# Altium PCB PCB_layout.PcbDoc
Units mil, origin at the board's own origin, x right, y up, seen from the top; angles counter-clockwise.
Board outline 2365 x 2720 mil, 2 copper layers (Top Layer, Bottom Layer); 30 components, 34 nets, 115 pads, 12 vias.
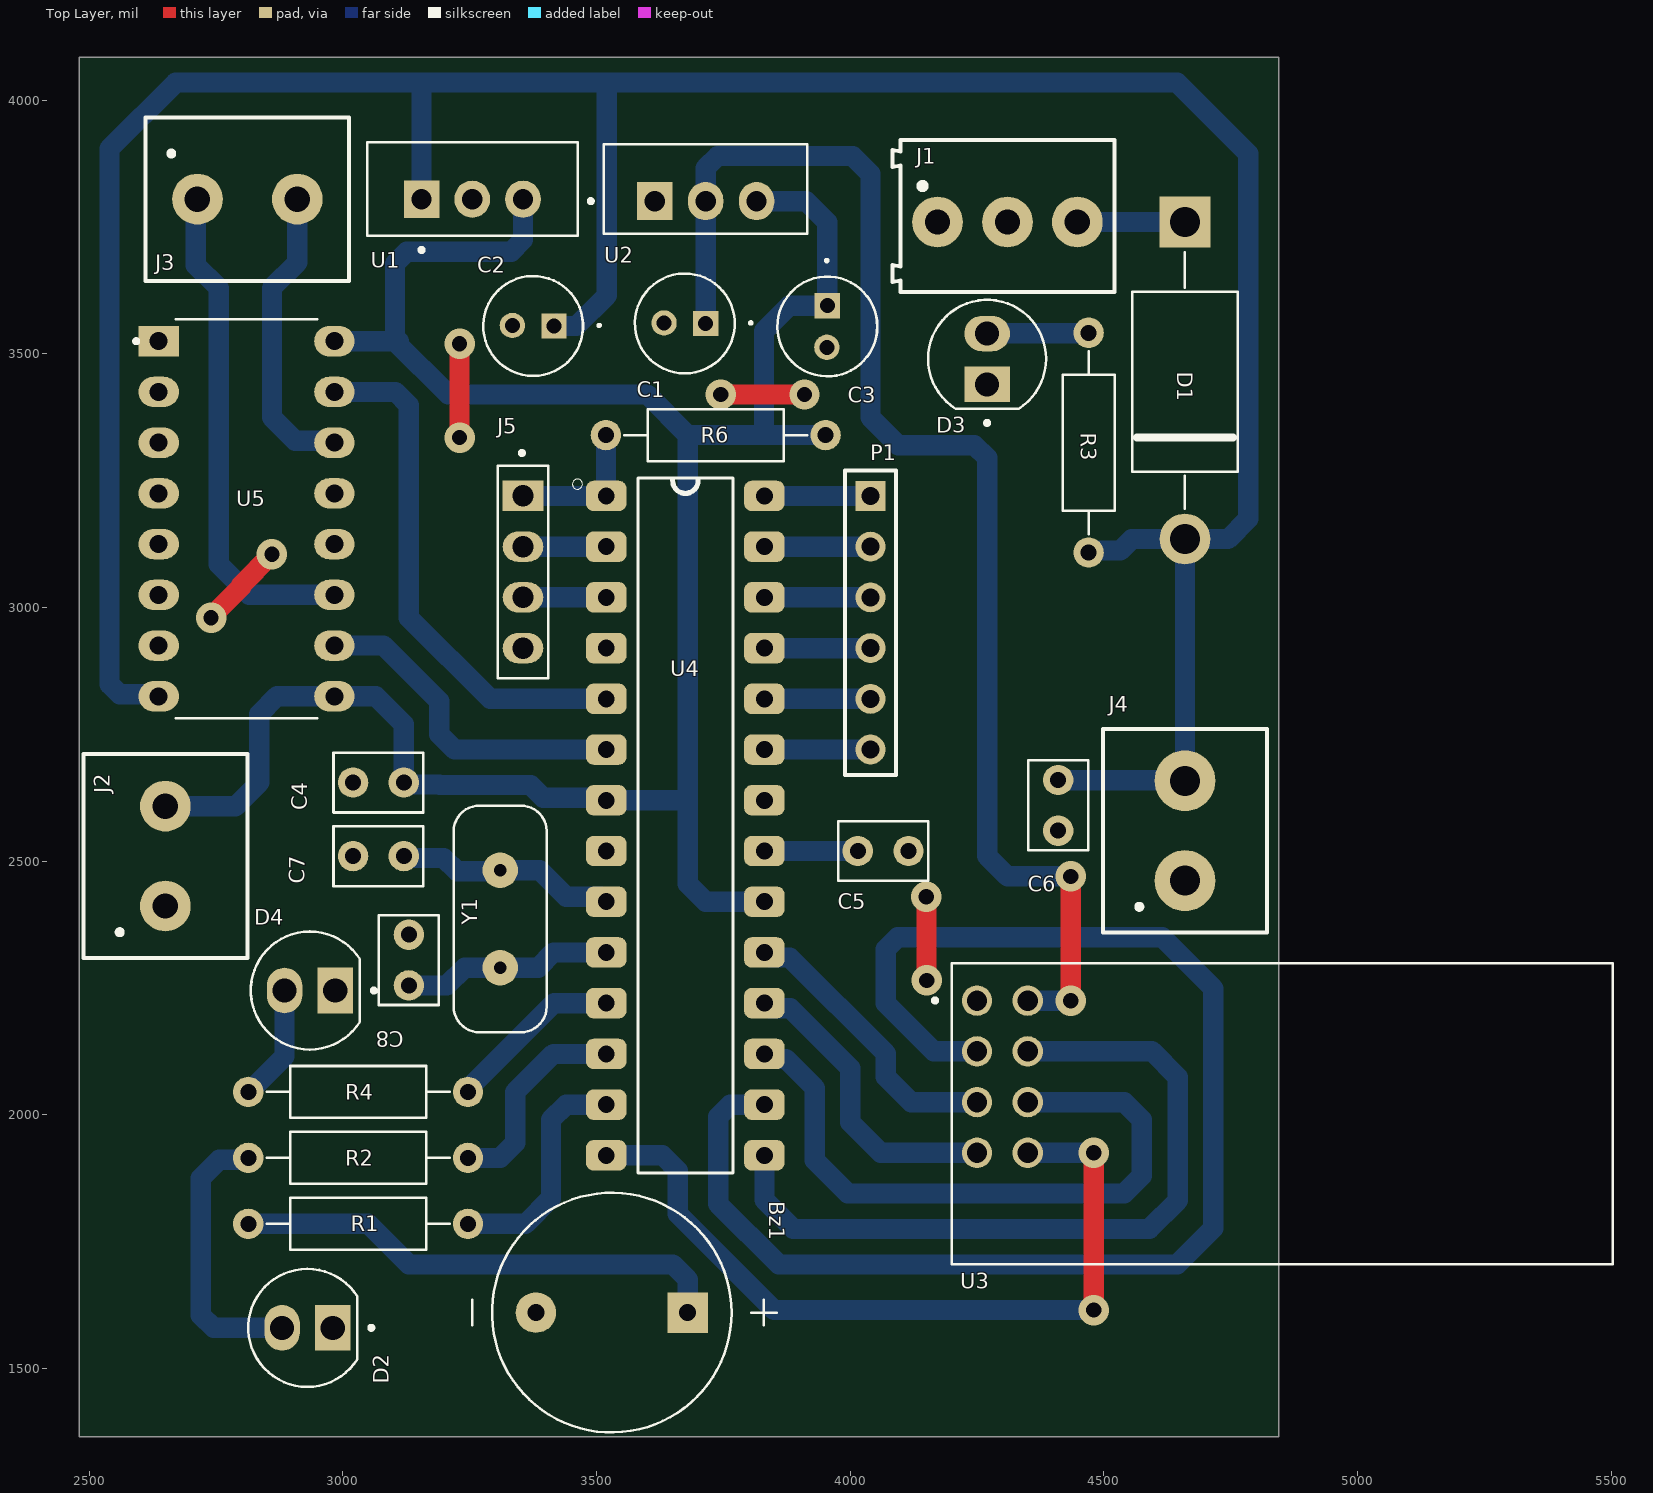
[diagram p0: Top Layer view]
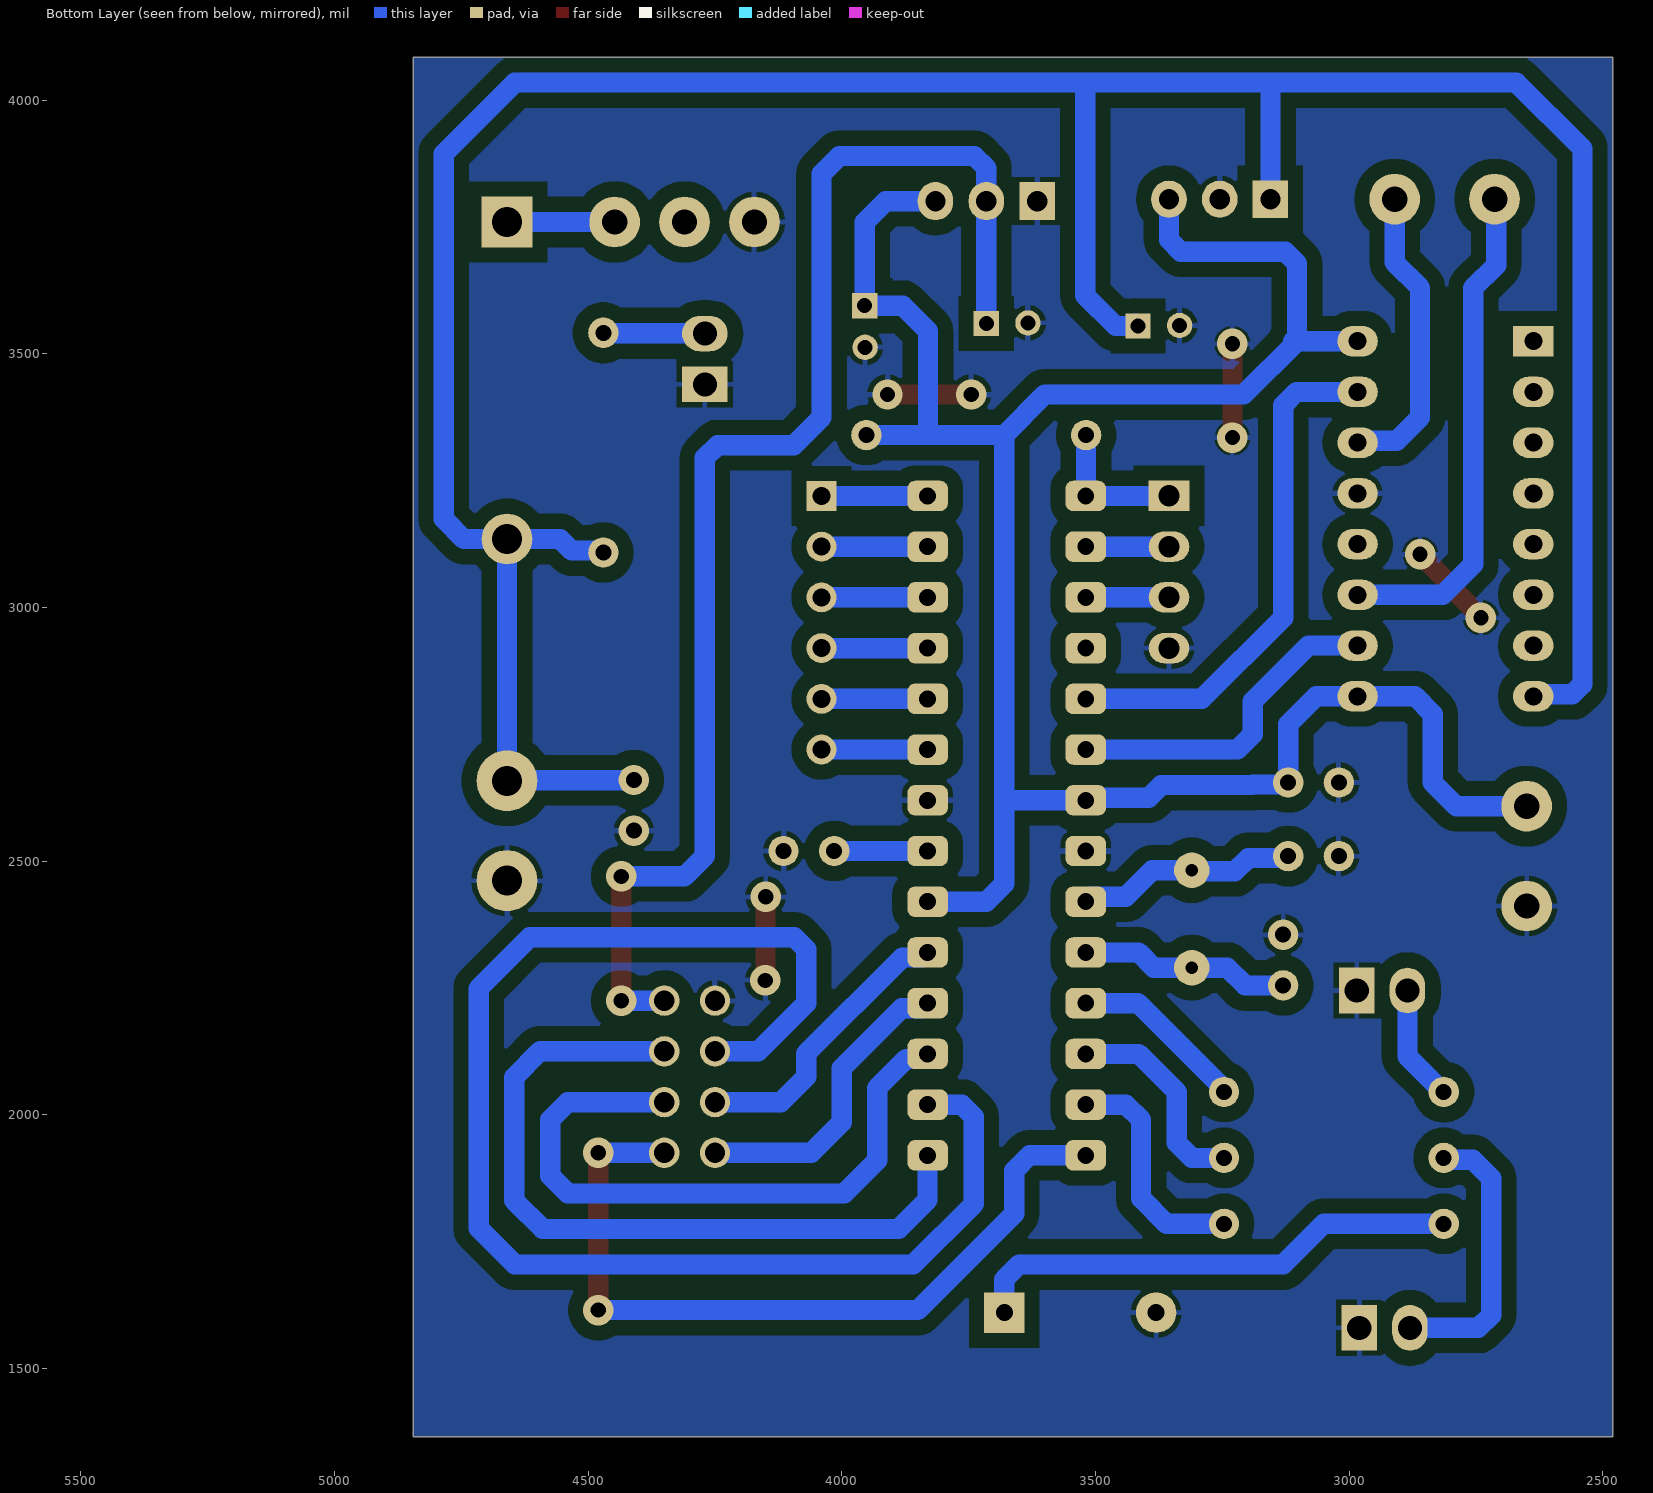
[diagram p1: Bottom Layer view, seen from below]
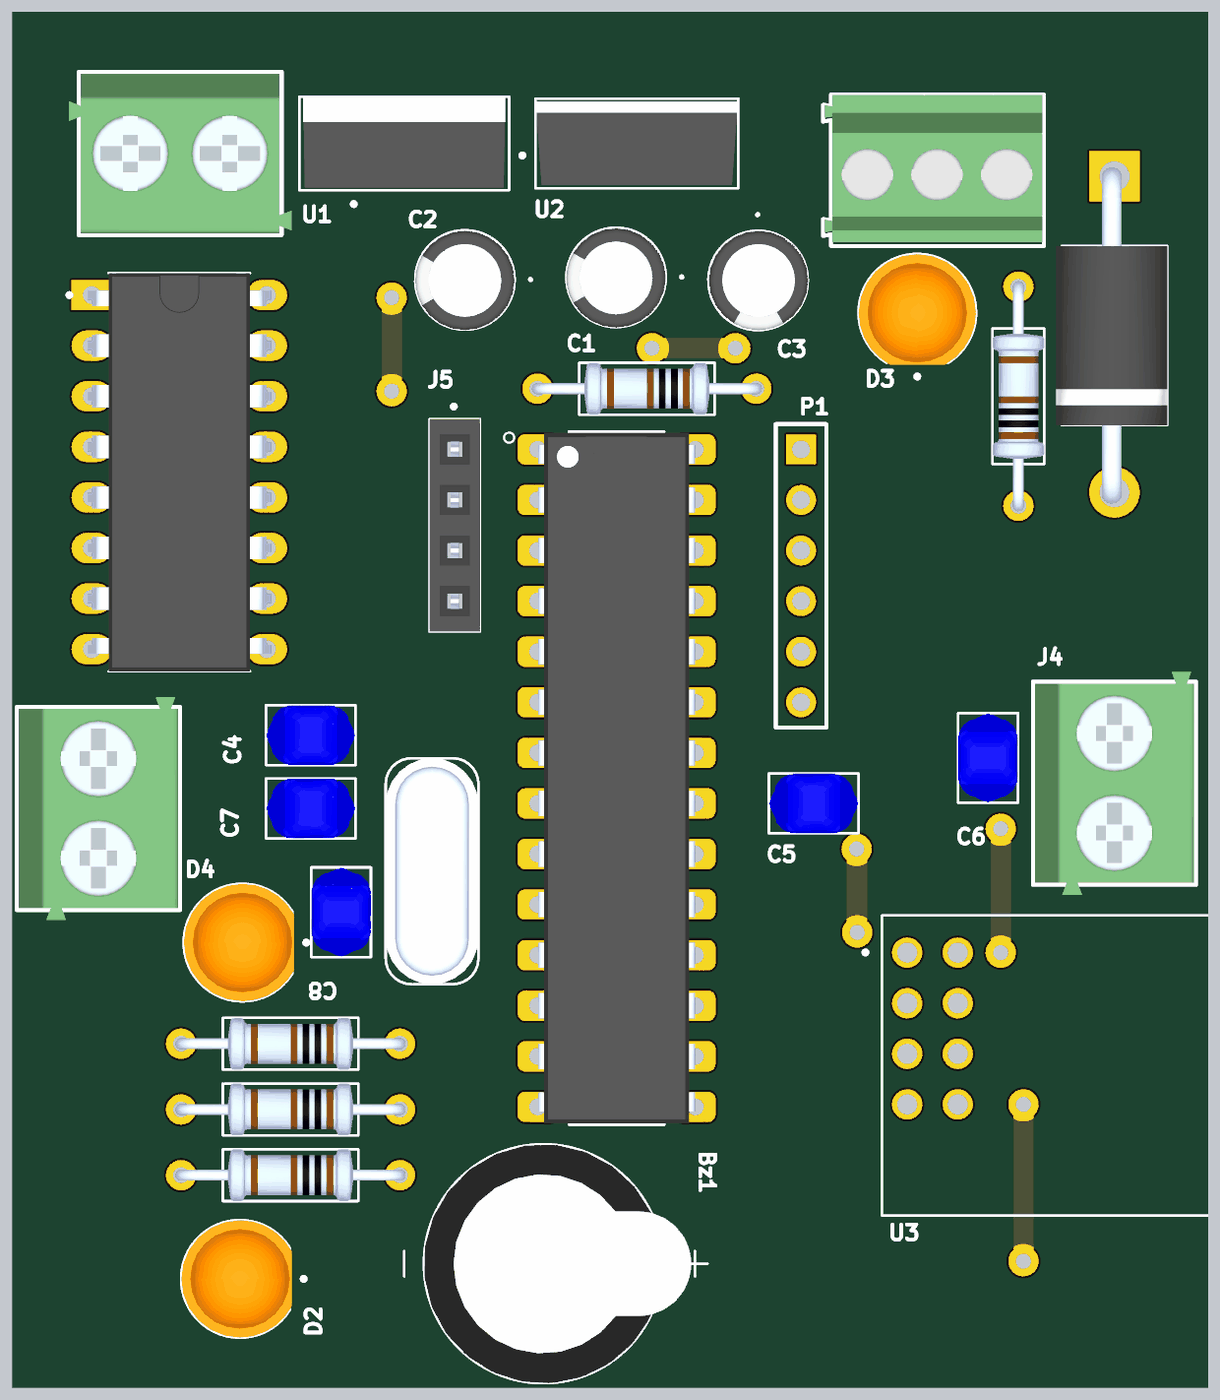
[diagram p2: 3D render of the assembled board from above, using the file's embedded part models]

## Layer stack, top to bottom
Top Solder: solder mask 0.4, Solder Resist, Dk 3.5
Top Layer: signal copper 1.4
Dielectric 1: dielectric 12.6, FR-4, Dk 4.8
Bottom Layer: signal copper 1.4
Bottom Solder: solder mask 0.4, Solder Resist, Dk 3.5

## Board outline
2480,1365 4845,1365 4845,4085 2480,4085

## Design rules (kind name [scope] priority, off if disabled: settings)
Clearance [All] p1: gap=30 ignorepadtopadclearanceinfootprint=FALSE
PolygonConnect [All] p1: connectstyle=Relief reliefconductorwidth=10 reliefentries=4 polygonreliefangle="90 Angle" airgapwidth=10
RoutingVias [All] p1: holewidth=30 width=60 viastyle="Through Hole" minholewidth=30 minwidth=60 maxholewidth=30 maxwidth=60
SolderMaskExpansion [All] p1: expansion=4 istentingtop=FALSE
Width [All] p1: maxlimit=50 minlimit=30 preferedwidth=40
30 further rules are at their usual default settings.

## Components (designator, comment, footprint, x,y, rotation, side; value= is the part's Value field where it differs from the comment)
Bz1 "AI-1223-TWT-12V-R" XDCR_AI-1223-TWT-12V-R 3530,1610 r270 top
C1 "10uF" CAPPRD500W50D500H1100 3674,3560 r180 top
C2 "100uF" CAPPRD500W50D500H1100 3375,3555 r180 top
C3 "10uF" CAPPRD500W50D500H1100 3955,3554 r270 top
C4 "100nF" CAPRB500W50L450T300H550 3020,2655 r0 top
C5 "100nF" CAPRB500W50L450T300H550 4115,2520 r180 top
C6 "100nF" CAPRB500W50L450T300H550 4410,2560 r90 top
C7 "22pF" CAPRB500W50L450T300H550 3020,2510 r0 top
C8 "22pF" CAPRB500W50L450T300H550 3130,2355 r270 top
D1 "1N5404" DIOAD1990W125L900D530 4660,3445 r270 top
D2 "L08R5000Q1" LEDRD254W57D500H1070 2930,1580 r180 top
D3 "L08R5000Q1" LEDRD254W57D500H1070 4270,3490 r90 top
D4 "L08R5000Q1" LEDRD254W57D500H1070 2935,2245 r180 top
J1 "691214110003" 691214110003 4310,3760 r0 top
J2 "TBlock 2" 691111710002#1 2650,2510 r90 top
J3 "TBlock 2" 691111710002#1 2811.57,3805 r0 top
J4 "TBlock 2" 691111710002#2 4660,2560 r90 top
J5 "Header 4" SULLINS_PPTC041LFBN-RC 3355,3070 r270 top
P1 "Header 6" HDR1X6 4040,3220 r270 top
R1 "100" RESAD1100W55L680D260 3030,1785 r0 top
R2 "220" RESAD1100W55L680D260 3030,1915 r0 top
R3 "1k" RESAD1100W55L680D260 4470,3325 r270 top
R4 "220" RESAD1100W55L680D260 3030,2045 r0 top
R6 "1k" RESAD1100W55L680D260 3735,3340 r0 top
U1 "LM7805" TO254P1054X470X1955-3 3255,3805 r0 top
U2 "LD1117V33" TO255P1020X450X1968-3 3715,3825 r0 top
U3 "NRF24L01P-MODULE-PCB" XCVR_NRF24L01P-MODULE-PCB 4851.75,2001.82 r0 top
U4 "ATMEGA328" DIP794W46P254L2967H457Q28B 3675,2570 r0 top
U5 "LD293" DIP880W50P254L2000H510Q16 2810,3175 r0 top
Y1 "16MHz" XTAL_ECS-160-20-4X 3310,2386.06 r270 top

## Footprints (in the part's own frame and the unit in brackets; to place one, negate y for a bottom-side part, rotate by r counter-clockwise, add the part's x,y. Pads: shape width x height; smd on the part's side, far side on the other; paste and mask are expansions set on the pad)
691111710002#1 [mm]
  round 2.54 hole 1.27: 1(-2.5,0) 2(2.5,0)
  silkscreen extent -5.1,-4.1 5.1,4.1, body extent -5.6,-4 5.6,4, height 11.01
691111710002#2 [mm]
  round 3.048 hole 1.5: 1(-2.5,0) 2(2.5,0)
  silkscreen extent -5.1,-4.1 5.1,4.1, body extent -5.6,-4 5.6,4, height 11.01
691214110003 [mm]
  round 2.54 hole 1.27: 1(-3.5,0) 2(0,0) 3(3.5,0)
  silkscreen extent -5.75,-3.5 5.35,4.1, body extent -5.68,-3.32 5.28,4.08, height 8.51
CAPPRD500W50D500H1100 [mil]
  round 50 hole 29.53: N(41,-1)
  rect 50x50 hole 29.53: P(-41,0)
  silkscreen extent -131,-98 98,98, body extent -108,-97 108,99, height 434
CAPRB500W50L450T300H550 [mil]
  round 60 hole 31.5: 1(0,0) 2(100,0)
  silkscreen extent -39,-59 139,59, body extent -38,-59 138,59, height 210
DIOAD1990W125L900D530 [mil]
  rect 100x100 hole 59.06: A(-315,0)
  round 100 hole 59.06: C(310,0)
  silkscreen extent -255,-104 250,104, body extent -332,-115 332,105, height 220
DIP794W46P254L2967H457Q28B [mil]
  rrect50% 80x60 hole 33.46: 1(-155.91,650) 2(-155.91,550) 3(-155.91,450) 4(-155.91,350) 5(-155.91,250) 6(-155.91,150) 7(-155.91,50) 8(-155.91,-50) 9(-155.91,-150) 10(-155.91,-250) 11(-155.91,-350) 12(-155.91,-450) 13(-155.91,-550) 14(-155.91,-650) 15(155.91,-650) 16(155.91,-550) 17(155.91,-450) 18(155.91,-350) 19(155.91,-250) 20(155.91,-150) 21(155.91,-50) 22(155.91,50) 23(155.91,150) 24(155.91,250) 25(155.91,350) 26(155.91,450) 27(155.91,550) 28(155.91,650)
  silkscreen extent -223,-685 94,685, body extent -156,-682 156,683, height 180
DIP880W50P254L2000H510Q16 [mil]
  rect 80x60 hole 35.43: 1(-173.23,350)
  oval 80x60 hole 35.43: 2(-173.23,250) 3(-173.23,150) 4(-173.23,50) 5(-173.23,-50) 6(-173.23,-150) 7(-173.23,-250) 8(-173.23,-350) 9(173.23,-350) 10(173.23,-250) 11(173.23,-150) 12(173.23,-50) 13(173.23,50) 14(173.23,150) 15(173.23,250) 16(173.23,350)
  silkscreen extent -221,-394 140,394, body extent -182,-394 182,394, height 201
HDR1X6 [mm] "Connector; Header; 6 Position"
  rect 1.5x1.5 hole 0.9: 1(0,0)
  round 1.5 hole 0.9: 2(2.54,0) 3(5.08,0) 4(7.62,0) 5(10.16,0) 6(12.7,0)
  silkscreen extent -1.27,-1.27 13.97,1.27
LEDRD254W57D500H1070 [mil]
  oval 70x90 hole 47.64: A(50,0)
  rect 70x90 hole 47.64: C(-50,0)
  silkscreen extent -130,-116 116,116, body extent -102,-116 116,116, height 358
RESAD1100W55L680D260 [mil]
  round 60 hole 31.5: 1(-216.54,0) 2(216.54,0)
  silkscreen extent -180,-51 180,51, body extent -227,-51 227,51, height 101
SULLINS_PPTC041LFBN-RC [mil]
  rect 60x80 hole 42.13: 1(-150,0)
  oval 60x80 hole 42.13: 2(-50,0) 3(50,0) 4(150,0)
  silkscreen extent -239,-50 210,50, body extent -210,-50 210,50, height 335
TO254P1054X470X1955-3 [mil]
  rect 70x73.23 hole 40: 1(-100,0)
  oval 70x73.23 hole 40: 2(0,0) 3(100,0)
  silkscreen extent -207,-104 207,113, body extent -200,-68 200,112, height 771
TO255P1020X450X1968-3 [mm]
  rect 1.778x1.91 hole 1.016: 1(-2.55,-0.605)
  oval 1.778x1.91 hole 1.016: 2(0,-0.605) 3(2.55,-0.605)
  silkscreen extent -5.85,-2.25 5.1,2.25, body extent -5.08,-2.09 5.08,2.11, height 22.87
XCVR_NRF24L01P-MODULE-PCB [mil]
  round 60 hole 40: 1(-601.75,223.18) 2(-501.75,223.18) 3(-601.75,123.18) 4(-501.75,123.18) 5(-601.75,23.18) 6(-501.75,23.18) 7(-601.75,-76.82) 8(-501.75,-76.82)
  silkscreen extent -688,-296 652,296
XDCR_AI-1223-TWT-12V-R [mil]
  round 80 hole 33.46: N(0,-149.61)
  rect 80x80 hole 33.46: P(0,149.61)
  silkscreen extent -236,-275 236,325, body extent -236,-236 236,293, height 376
XTAL_ECS-160-20-4X [mil]
  round 70 hole 24.8: 1(-96.06,0) 2(96.06,0)
  silkscreen extent -223,-92 223,92, body extent -223,-92 223,92, height 138

## Part data
Bz1: library part Buzzer, "ELECTRO-MECHANICAL AUDIO INDICATOR", Package="2225 PUI Audio", Availability="In Stock", MF="PUI Audio,", MP=AI-1223-TWT-12V-R, Price=None, Purchase-URL=https://pricing.snapeda.com/search/part/AI-1223-TWT-12V-R/?ref=eda
C1 C2 C3: library part "Electrolytic capacitor", "FS-A", Package=None, Availability=Unavailable, MF="{'manufacturer': u'Panasonic'}", MP=EEUFS0J221B, Price=None
C4 C5 C6 C7 C8: library part "Ceramic capacitor", "2200 pF Â±10% 250V Ceramic Capacitor X7R Radial", Package="Radial TDK", Check_prices=https://www.snapeda.com/parts/FG24X7R2E222KNT06/TDK/view-part/?ref=eda, Digi-Key_Part_Number=445-173386-1-ND, MF=TDK, MP=FG24X7R2E222KNT06, Purchase-URL=https://pricing.snapeda.com/search/part/FG24X7R2E222KNT06/?ref=eda, SnapEDA_Link=https://www.snapeda.com/parts/FG24X7R2E222KNT06/TDK/view-part/?ref=snap
D1: library part "Schrotic diode", "Diode Standard 400 V 3A Through Hole DO-201AD", Package="AXIAL LEAD-2 ON Semiconductor", Availability="In Stock", Check_prices=https://www.snapeda.com/parts/1N5404/Onsemi/view-part/?ref=eda, MF="ON Semiconductor", MP=1N5404, Price=None, Purchase-URL=https://pricing.snapeda.com/search/part/1N5404/?ref=eda, SnapEDA_Link=https://www.snapeda.com/parts/1N5404/Onsemi/view-part/?ref=snap
D2 D3 D4: library part LED, "LED, Orange, Through Hole, T-1 3/4 (5mm), 30 mA, 2.1 V, 635 nm", Package=None, Availability=Unavailable, MF="{'manufacturer': u'LED Technology'}", MP=L08R5000Q1, Price=None
J1: library part "Terminal blocks - 3Pins (Small)", "3 Position Wire to Board Terminal Block Horizontal with Board 0.138 (3.50mm) Through Hole", Package=None, Availability="In Stock", Check_prices=https://www.snapeda.com/parts/691214110003/Wurth+Elektronik/view-part/?ref=eda, MF="Wurth Elektronik", MP=691214110003, Price=None, Purchase-URL=https://pricing.snapeda.com/search/part/691214110003/?ref=eda, SnapEDA_Link=https://www.snapeda.com/parts/691214110003/Wurth+Elektronik/view-part/?ref=snap
J2 J3 J4: library part "Terminal Block - 2Pins", "2 Position Wire to Board Terminal Block Horizontal with Board 0.197 _5.00mm_ Through Hole", Package=None, Availability=Unavailable, MF="Wurth Electronics", MP=691111710002, Price=None, SnapEDA_Link=https://www.snapeda.com/parts/691111710002/Wurth%20Electronics%20Inc./view-part/1195092/?ref=snap
J5: library part "Female header - 4Pins", "4 Position Header Connector Through Hole", Package=None, Availability=Warning, Check_prices=https://www.snapeda.com/parts/PPTC041LFBN-RC/Sullins%20Connector%20Solutions/view-part/285917/?ref=eda, MF="Sullins Connector", MP=PPTC041LFBN-RC, Price=None, Purchase-URL=https://pricing.snapeda.com/search/part/PPTC041LFBN-RC/?ref=eda, SnapEDA_Link=https://www.snapeda.com/parts/PPTC041LFBN-RC/Sullins%20Connector%20Solutions/view-part/285917/?ref=snap
P1: "Header, 6-Pin", LatestRevisionDate=17-Jul-2002, LatestRevisionNote="Re-released for DXP Platform.", Publisher="Altium Limited"
R1 R2 R3 R4 R6: library part "Resistor (0.25W)", "(MFR-25FBF52-10K) 10,2 kOhm bei 1% 0,25W, 1/4W Durchbohrlochwiderstand Axial Metal Film", Package="Axial Yageo", Digi-Key_Part_Number=10.2KXBK-ND, MF=Yageo, MP=MFR-25FBF52-10K, Purchase-URL=https://pricing.snapeda.com/search/part/MFR-25FBF52-10K/?ref=eda, SnapEDA_Link=https://www.snapeda.com/parts/MFR-25FBF52-10K/Yageo/view-part/424333/?ref=snap
U1: library part LM7805CT/NOPB, Package=None, Availability=Unavailable, MP=LM7805CT/NOPB, Price=None
U2: Package=None, Availability=Unavailable, MP=LD1117V33, Price=None
U3: "- Transceiver For Use With nRF24L01+", Package=None, Availability=Bad, MF="Nordic Semiconductor", Mouser-Purchase-URL=https://snapeda.com/shop?store=Mouser&id=230534, MP=NRF24L01P-MODULE-PCB, Price=None, SnapEDA_Link=https://www.snapeda.com/parts/NRF24L01P-MODULE-PCB/Nordic%20Semiconductor%20ASA/view-part/230534/?ref=snap
U4: library part ATMEGA328P-PU, "ATmega Series 20 MHz 32 KB Flash 2 KB SRAM 8-Bit Microcontroller - DIP-28", Package=None, Availability=Unavailable, MP=ATMEGA328P-PU, Price=None
U5: library part L293D, "4-Channel Motor Driver 24V 16-Pin Power PDIP Tube", Package=None, Availability=Unavailable, MP=L293D, Price=None
Y1: library part "Crystal oscilator", "CRYSTAL T/H", Package=None, Availability=Unavailable, MF="{'manufacturer': u'ECS Inc.'}", MP=ECS-160-S-4, Price=None

## Via types
v1: diameter 60, hole 30, Top Layer to Bottom Layer, 12 vias

## Nets (pads, with @x,y where several pads share a name; then routed paths per layer and width w, separated by ;. In a path a pad name is that pad's centre, name@x,y a point inside that pad or via, vN(x,y) a via of type N, cw(c..) or ccw(c..) an arc to the next point about the centre after c; other vN are vias at no path point)
+3V3: C1.P U2.2 U3.2 | length 2695.5
  Top Layer w40: v1(4435,2225) v1(4435,2470)
  Bottom Layer w40: C1.P 3715,3866.57 3738.43,3890 4005,3890 4040,3855 4040,3375 4095,3320 4245,3320 4270,3295 4270,2510 4310,2470 v1(4435,2470) ; U3.2 v1(4435,2225)
+12: C2.P C6.2 D1.C J4.2 R3.2 U1.1 U5.8 | length 6095.6
  Bottom Layer w40: U5.8 2632.95,2828.83 2559.6,2828.83 2540,2848.43 2540,3905 2670,4035 3155,4035 ; U1.1 3155,4035 ; C2.P@3421,3560 C2.P 3460,3555 3520,3615 3520,4035 ; C6.2 4410.79,2659.21 4659.21,2659.21 J4.2 D1.C ; R3.2 4473.83,3112.29 4532.29,3112.29 4555,3135 D1.C ; 3155,4035 3520,4035 ; 3520,4035 4645,4035 4785,3895 4785,3175 4745,3135 D1.C
buzzer: R1.2 U4.13 | length 460.7
  Bottom Layer w40: R1.2 3360,1785 3410,1835 3410,1990 3440,2020 U4.13
CE: U3.3 U4.16 | length 2824.3
  Bottom Layer w40: U4.16 3763.43,2020 3740,1996.57 3740,1823.99 3858.99,1705 4645,1705 4715.93,1775.93 4715.93,2249.07 4615,2350 4093.43,2350 4070,2326.57 4070,2220 4165,2125 U3.3
CSN: U3.4 U4.15 | length 1509.9
  Bottom Layer w40: U4.15 3830.91,1832.08 3887.99,1775 4590,1775 4645.93,1830.93 4645.93,2074.07 4595,2125 U3.4
echo: P1.6 U4.23 | length 209.1
  Bottom Layer w40: U4.23 P1.6
GND: Bz1.N C1.N C2.N C3.N C4.1 C5.1 C6.1 C7.1 C8.1 D2.C D3.C D4.C J1.1 J2.1 J4.1 J5.4 U1.2 U2.1 U3.1 U4.8 U4.22 U5.13 | length 690.1
  Top Layer w40: v1(2740,2980) 2740,2981.56 2799.32,3040.88 2799.32,3044.32 v1(2860,3105) ; v1(3230,3335) v1(3230,3520) ; v1(3745,3420) v1(3910,3420) ; v1(4150,2430) 4150.53,2429.47 4150.53,2274.24 4151.07,2273.71 v1(4151.07,2265)
green_led: R4.2 U4.11 | length 346.8
  Bottom Layer w40: R4.2@3246.54,2046.54 3246.54,2050.41 3280,2083.88 3280,2083.99 3416.01,2220 U4.11
GSM_rx: P1.4 U4.25 | length 209.1
  Bottom Layer w40: U4.25 P1.4
GSM_tx: P1.3 U4.26 | length 209.1
  Bottom Layer w40: U4.26 P1.3
IRQ: U3.8 U4.14 | length 1577
  Top Layer w40: v1(4480,1615) v1(4480,1925)
  Bottom Layer w40: U4.14 3630,1920 3660,1890 3660,1805 3850,1615 v1(4480,1615) ; U3.8 v1(4480,1925)
MISO: U3.7 U4.18 | length 604
  Bottom Layer w40: U4.18 3840.91,2210 3882.01,2210 4000,2092.01 4000,1985 4060,1925 U3.7
MOSI: U3.6 U4.17 | length 1305.7
  Bottom Layer w40: U4.17 3840.91,2110 3872.83,2110 3930,2052.83 3930,1910 3995,1845 4540,1845 4575,1880 4575,1990 4540,2025 U3.6
NetBz1_P: Bz1.P R1.1 | length 976.9
  Bottom Layer w40: R1.1 3050,1785 3130,1705 3650,1705 3679.61,1675.39 Bz1.P
NetC5_2: C5.2 U4.21 | length 184.1
  Bottom Layer w40: U4.21 C5.2
NetD1_A: D1.A J1.3 | length 212.2
  Bottom Layer w40: J1.3 D1.A
NetD2_A: D2.A R2.1 | length 550.4
  Bottom Layer w40: R2.1 2809.64,1911.17 2756.17,1911.17 2720,1875 2720,1605 2745,1580 D2.A
NetD3_A: D3.A R3.1 | length 200.6
  Bottom Layer w40: D3.A 4270.77,3540.77 4469.23,3540.77 R3.1
NetD4_A: D4.A R4.1 | length 230.5
  Bottom Layer w40: R4.1 2815,2045 2885,2115 D4.A
NetJ3_1: J3.1 U5.11 | length 993
  Bottom Layer w40: J3.1 2710,3801.85 2710,3675 2755,3630 2755,3085 2815,3025 U5.11
NetJ3_2: J3.2 U5.14 | length 594.6
  Bottom Layer w40: J3.2 2910,3680 2860,3630 2860,3375 2906.17,3328.83 2979.4,3328.83 U5.14
red_led: R2.2 U4.12 | length 418.2
  Bottom Layer w40: R2.2@3244.37,1915 3310,1915 3340,1945 3340,2045 3415,2120 U4.12
reset: J5.1 R6.1 U4.1 | length 284.4
  Bottom Layer w40: J5.1 U4.1 3518.78,3220.31 3518.78,3339.68 R6.1
rx: J5.3 U4.3 | length 164.1
  Bottom Layer w40: J5.3 U4.3
SCK: U3.5 U4.19 | length 568.2
  Bottom Layer w40: U4.19 3840.91,2310 3881.01,2310 4070,2121.01 4070,2075 4120,2025 U3.5
sensor1: P1.2 U4.27 | length 209.1
  Bottom Layer w40: U4.27 P1.2
sensor2: P1.1 U4.28 | length 209.1
  Bottom Layer w40: U4.28 P1.1
trig: P1.5 U4.24 | length 209.1
  Bottom Layer w40: U4.24 P1.5
tx: J5.2 U4.2 | length 164.1
  Bottom Layer w40: J5.2 U4.2
valve1: U4.6 U5.10 | length 658.9
  Bottom Layer w40: U5.10 3080,2925 3190,2815 3190,2750 3220,2720 U4.6
valve2: U4.5 U5.15 | length 1031.7
  Bottom Layer w40: U5.15 3103.65,3425 3130,3398.65 3130,2980 3290,2820 U4.5
VCC: C3.P C4.2 J2.2 R6.2 U1.3 U2.3 U4.7 U4.20 U5.9 U5.16 | length 4633.1
  Bottom Layer w40: J2.2 2788.43,2608.43 2835,2655 2835,2790 2870,2825 3065,2825 3120,2770 C4.2 3123.83,2651.17 3189.83,2651.17 3191.01,2650 3370,2650 3395,2625 3514.09,2625 U4.7 3675,2620 3680,2615 ; U5.16 3110,3525 ; U1.3 3355,3725.04 3331.57,3701.61 3126.07,3701.61 3102.64,3678.17 3102.64,3525 3207.55,3420.09 3599.91,3420.09 3680,3340 ; U2.3 3913.82,3801.18 3955,3760 C3.P 3880,3595 3830,3545 3830,3340 ; U4.20 3715,2420 3680,2455 3680,2615 ; R6.2 3830,3340 ; 3680,2615 3680,3340 ; 3680,3340 3830,3340
xtal1: C7.2 U4.9 Y1.1 | length 438.1
  Bottom Layer w40: C7.2 3123.83,2506.17 3198.83,2506.17 3225,2480 3307.87,2480 Y1.1 3387.87,2482.13 3440,2430 3509.09,2430 U4.9
xtal2: C8.2 U4.10 Y1.2 | length 416
  Bottom Layer w40: C8.2 3205,2255 3240,2290 3385,2290 3415,2320 U4.10
pads on no net: J1.2 U4.4 U5.1 U5.2 U5.3 U5.4 U5.5 U5.6 U5.7 U5.12

## Polygon pours and split planes (outlines as drawn)
GND on Bottom Layer "GND_L02_P000" (solid, pour order 0): 2480,4085 2480,1365 4845,1365 4845,4085